# Altium PCB STM32 Project 1C.PcbDoc
Units mm, origin at the board's own origin, x right, y up, seen from the top; angles counter-clockwise.
Board outline 45 x 45 mm, 2 copper layers (Top Layer, Bottom Layer), stack 0.695 mm thick; 47 components, 42 nets, 216 pads, 48 vias.
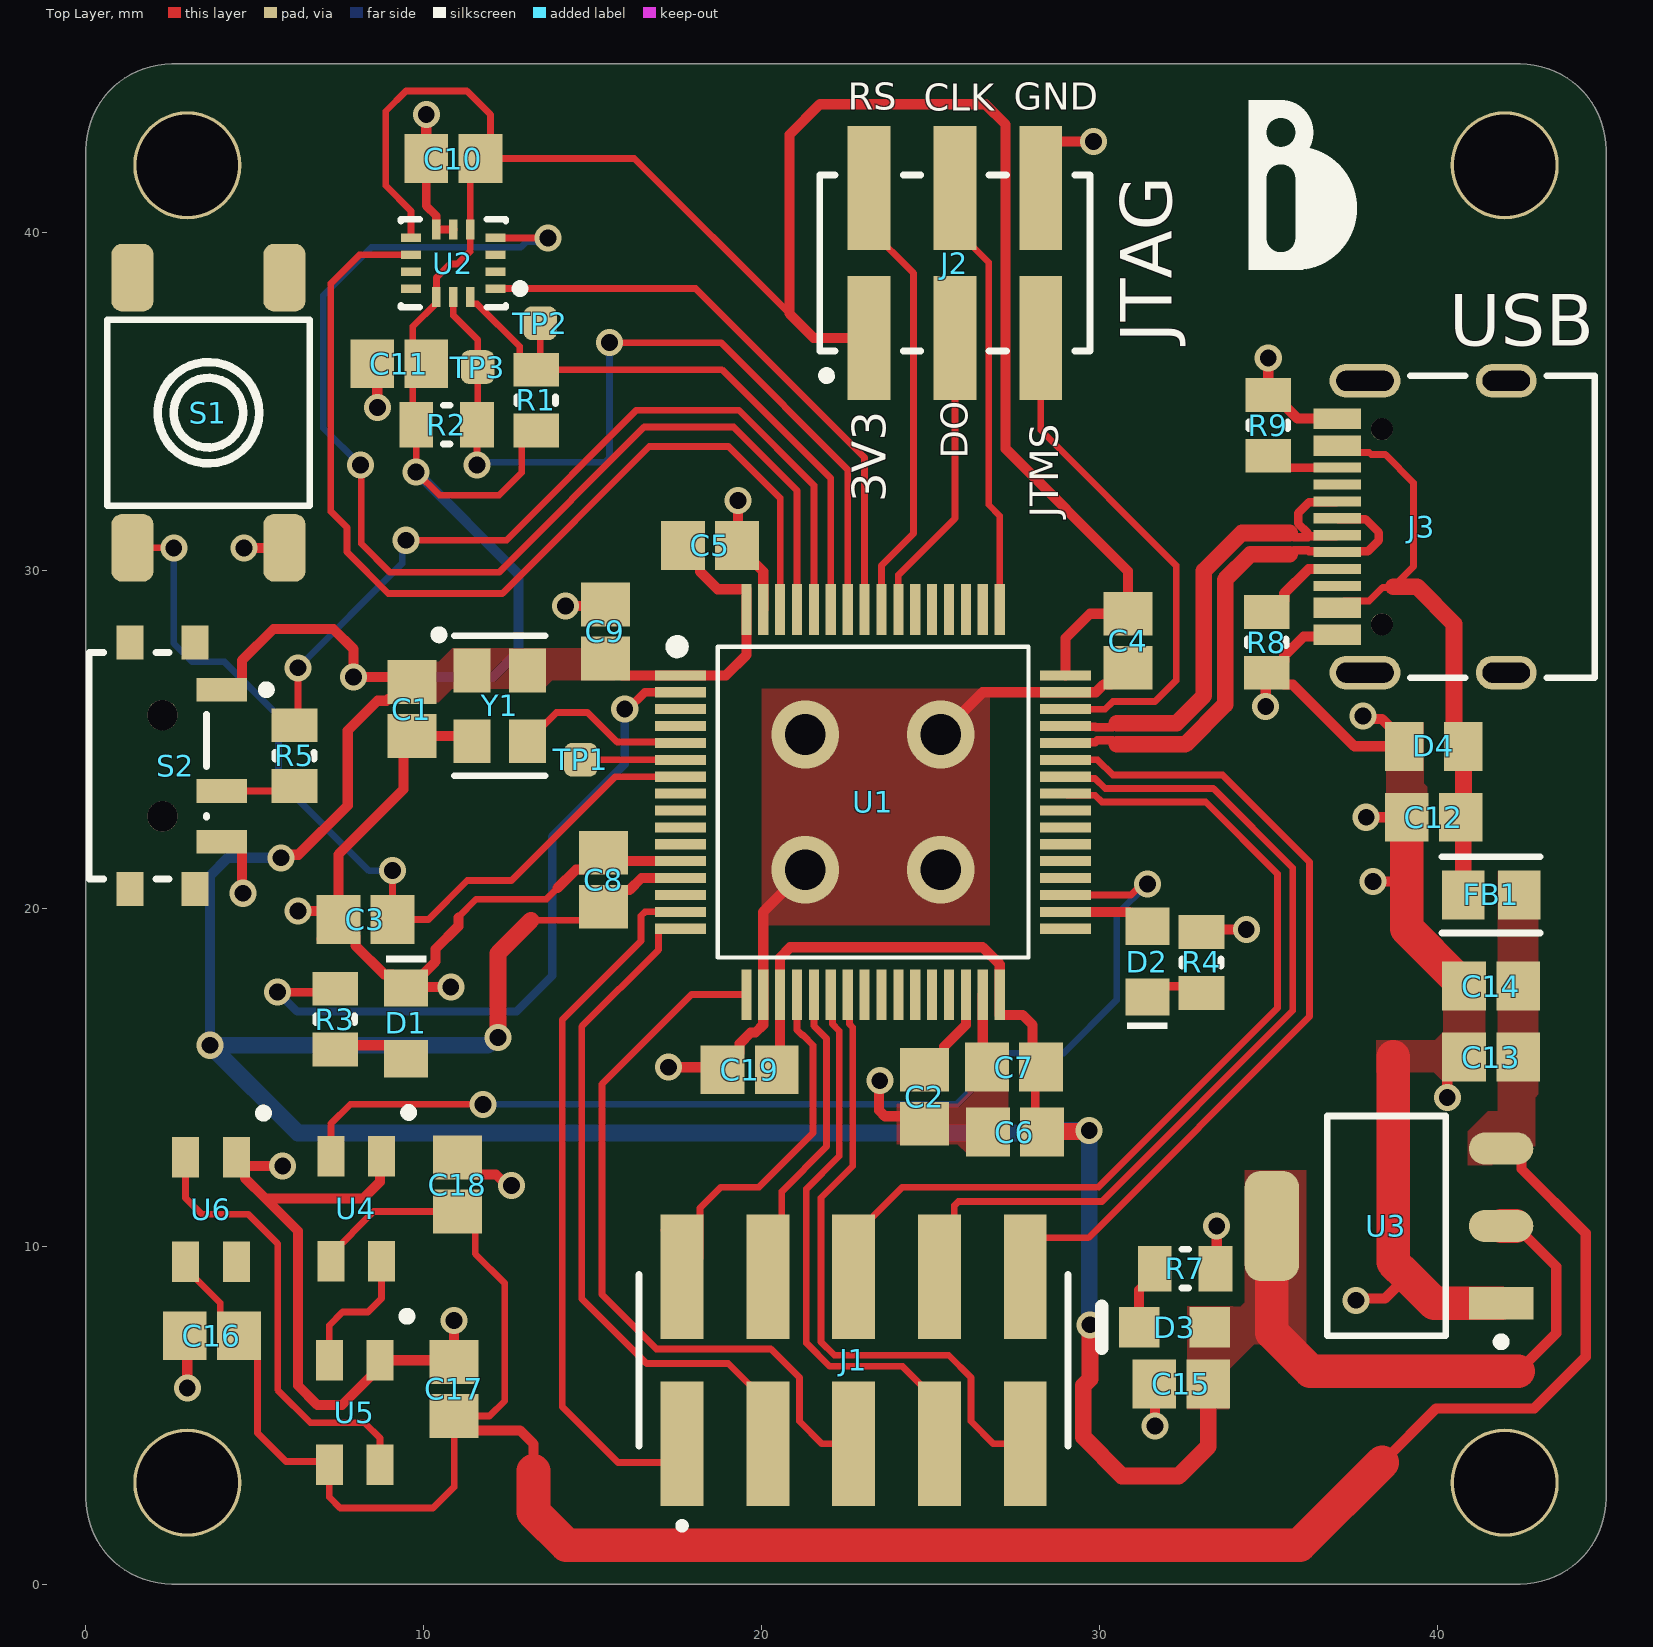
[diagram p0: Top Layer view]
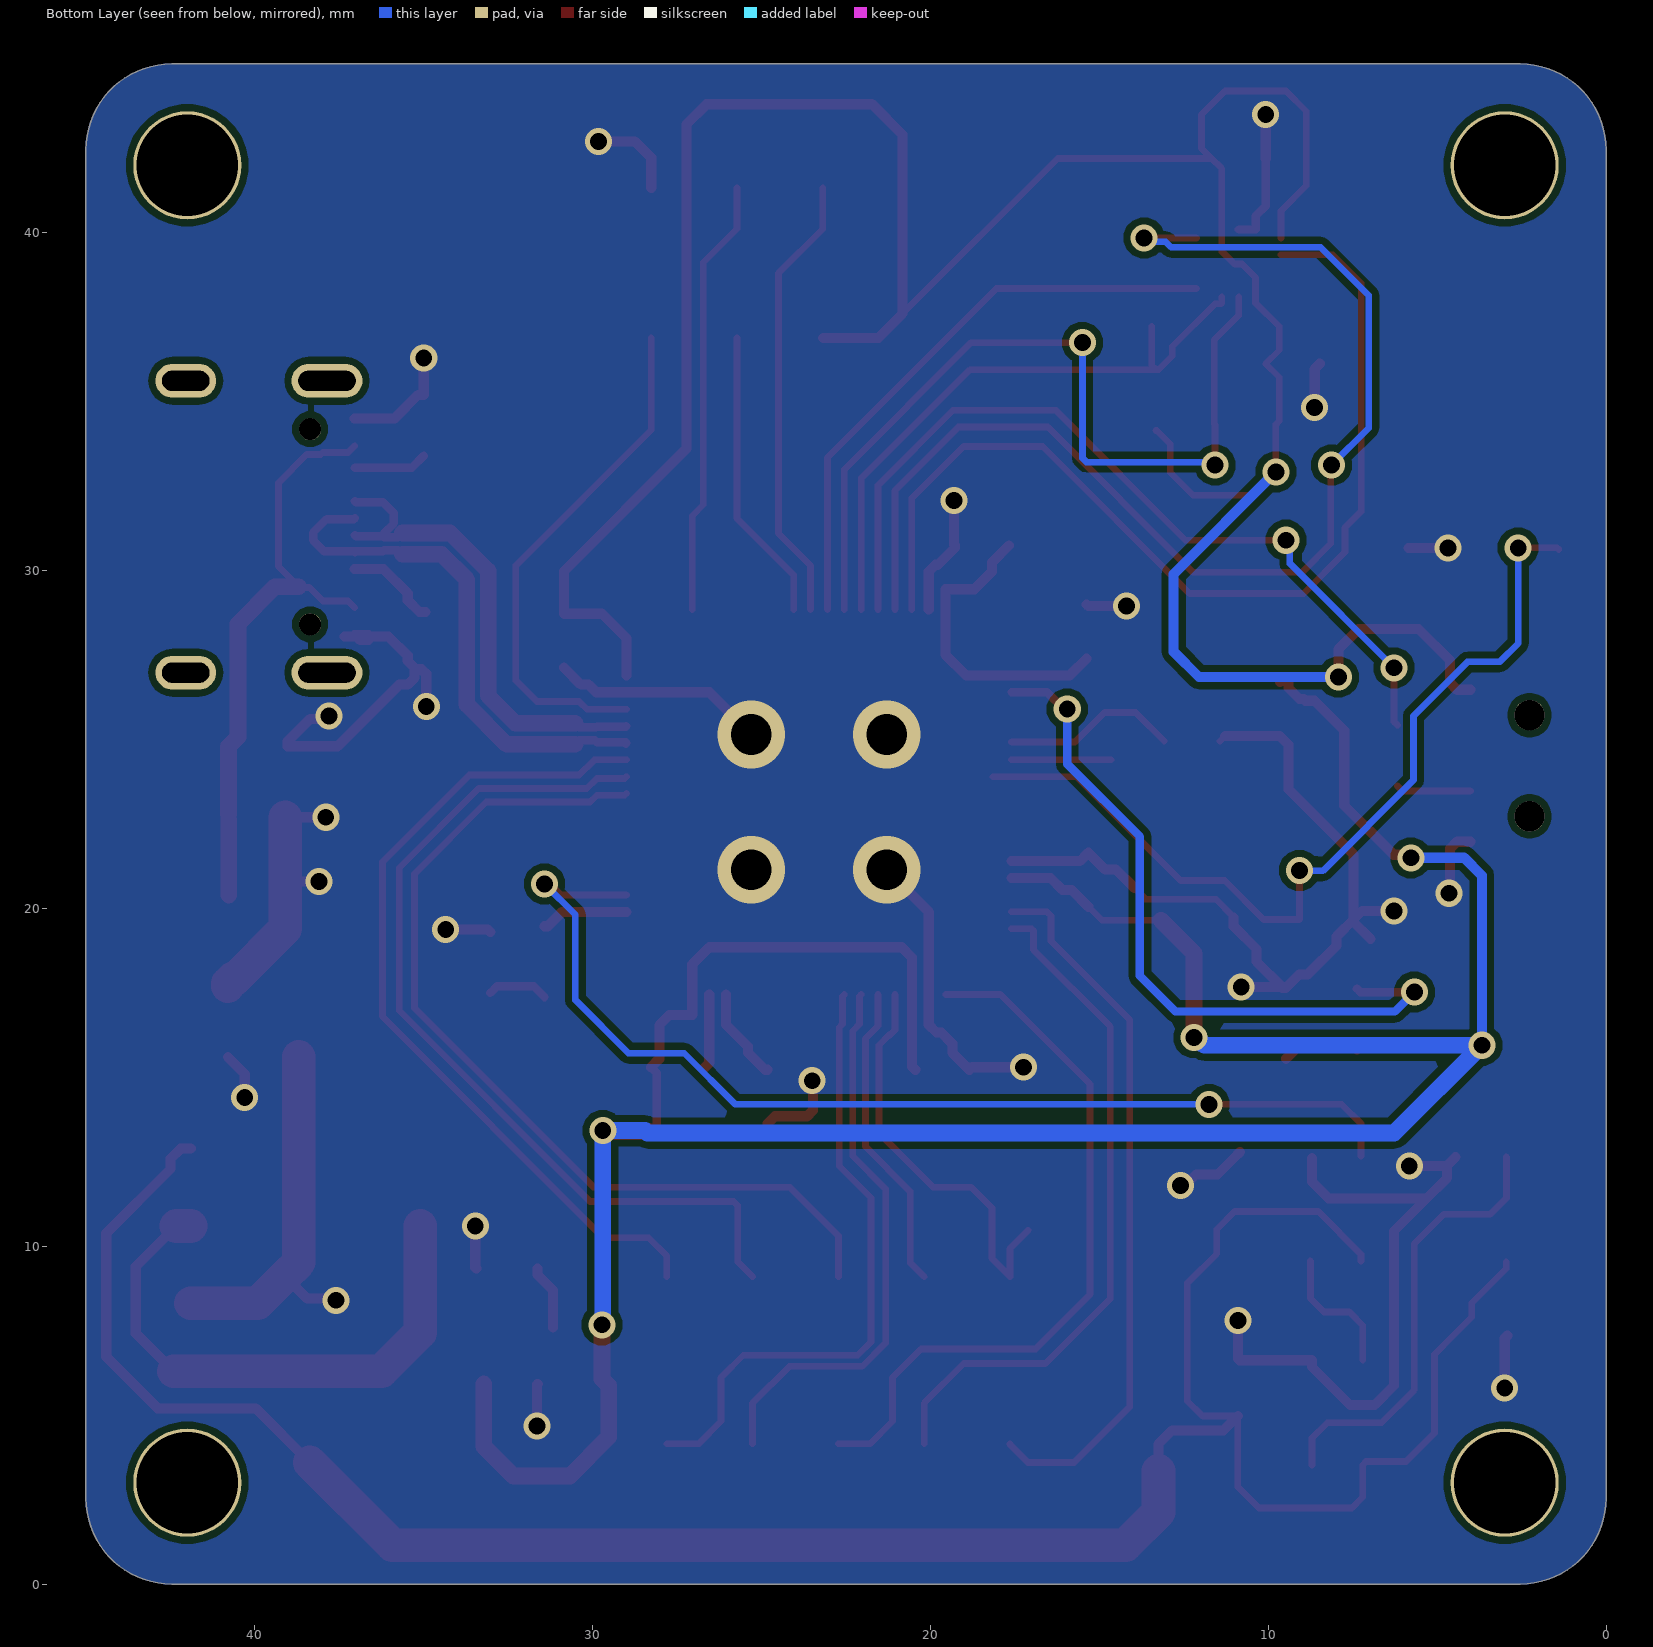
[diagram p1: Bottom Layer view, seen from below]
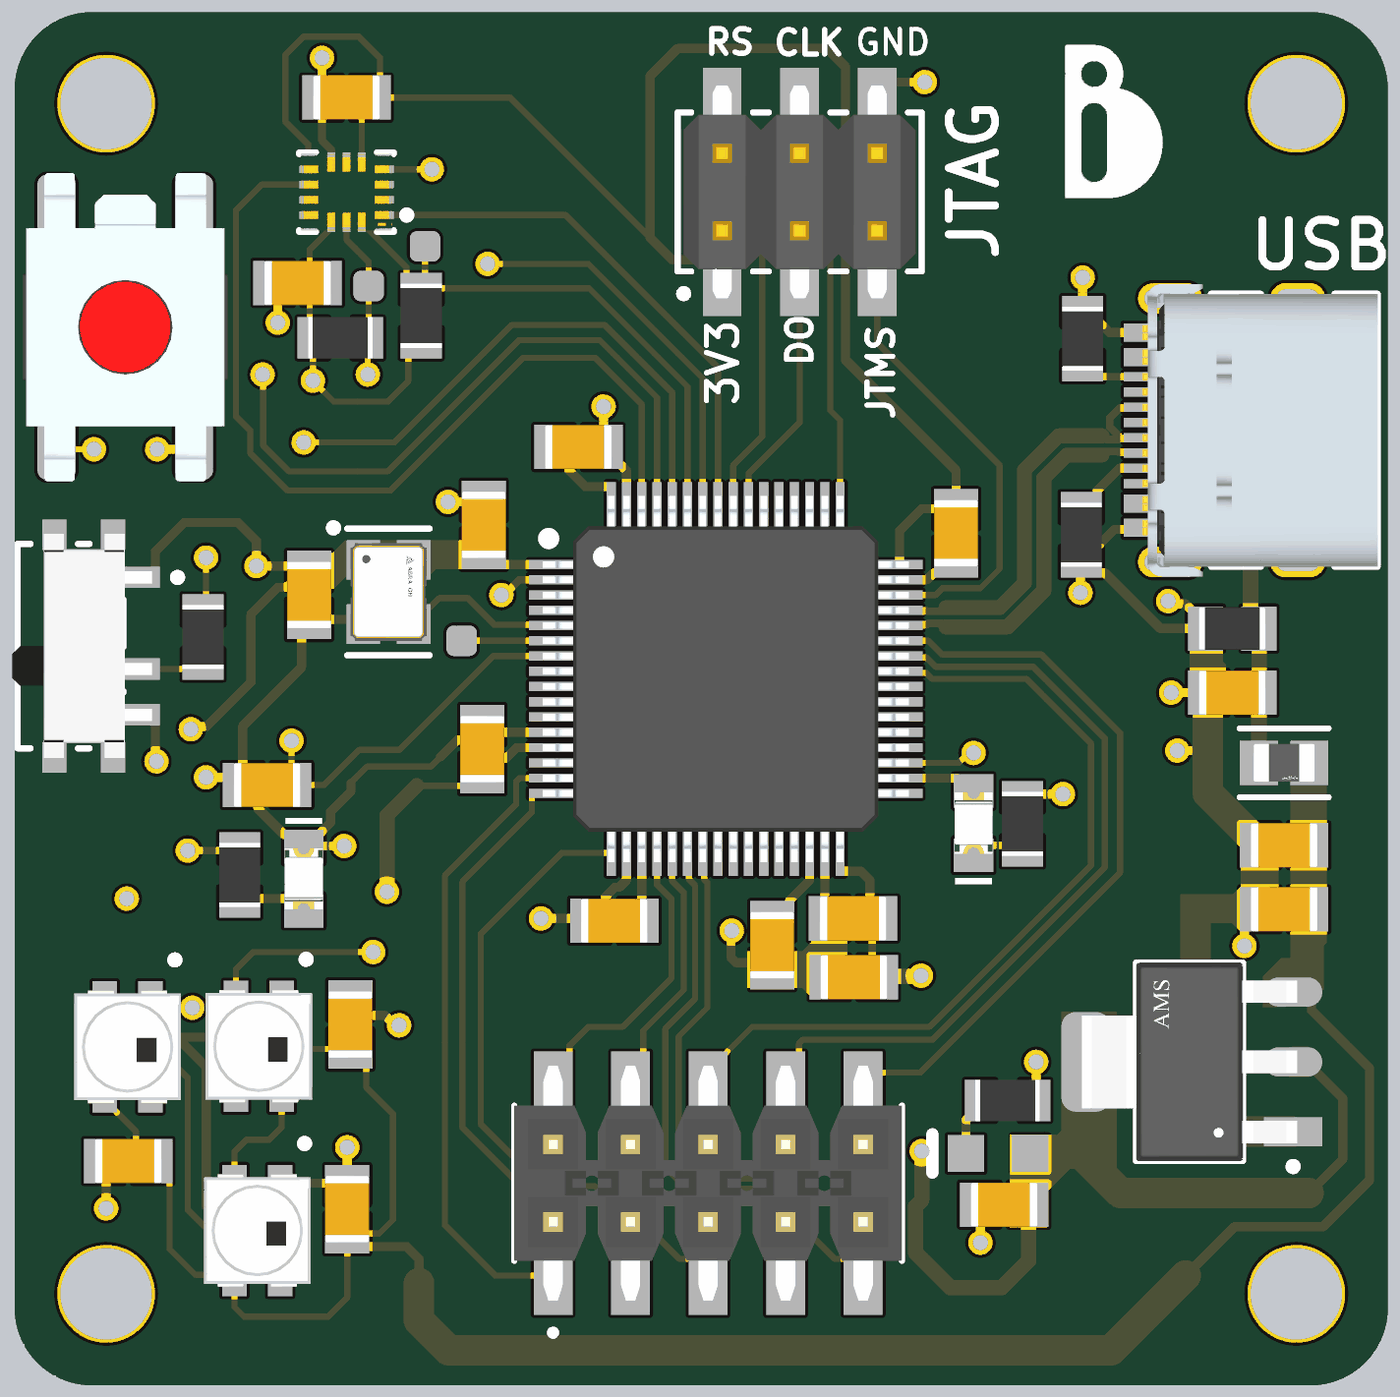
[diagram p2: 3D render of the assembled board from above, using the file's embedded part models]

## Layer stack, top to bottom
Top Solder: solder mask 0.0102, Solder Resist, Dk 4.6
Top Layer: signal copper 0.0152
Dielectric 1: dielectric 0.665, FR-4, Dk 4.6
Bottom Layer: signal copper 0.0152
Bottom Solder: solder mask 0.0102, Solder Resist, Dk 4.6

## Board outline
0,2.54 0,42.46 cw(c2.54,42.46) 2.54,45 42.46,45 cw(c42.46,42.46) 45,42.46 45,2.54 cw(c42.46,2.54) 42.46,0 2.54,0 cw(c2.54,2.54)

## Design rules (kind name [scope] priority, off if disabled: settings)
Clearance [All] p1: gap=0.2 ignorepadtopadclearanceinfootprint=TRUE except(0.127: Arc-Arc Arc-Track Track-Track SMDPad-SMDPad; 0.33: Arc-Hole Track-Hole)
DiffPairsRouting [All] p1: maxlimit=0.14 minlimit=0.14 mostfreqgap=0.14 toplayer_minwidth=0.25 toplayer_maxwidth=0.49 toplayer_prefwidth=0.49 bottomlayer_minwidth=0.25 bottomlayer_maxwidth=0.49 bottomlayer_prefwidth=0.49 impedanceprofiledriven=TRUE impedanceprofileid={F4CBB084-590F-4738-A755-8F10FD4772D8} impedanceprofilevalue=90.000000 maxuncoupledlength=12.7
HoleSize [All] p1: absolutevalues=TRUE maxlimit=5 minlimit=0.025 maxpercent=80.000 minpercent=20.000
MinimumSolderMaskSliver [All] p1: minsoldermaskwidth=0.04
PlaneConnect [All] p1: planeconnectstyle=Direct reliefexpansion=0.508 reliefentries=4 reliefconductorwidth=0.254 reliefairgap=0.254
PolygonConnect [All] p1: connectstyle=Direct reliefconductorwidth=0.254 reliefentries=4 polygonreliefangle="90 Angle" airgapwidth=0.254
RoutingVias [All] p1: holewidth=0.711 width=1 viastyle="Through Hole" minholewidth=0.5 minwidth=0.8 maxholewidth=1 maxwidth=1.5
SilkToSolderMaskClearance [IsPad] p1: minsilkscreentomaskgap=0.1 clearancetoexposedcopper=TRUE
SolderMaskExpansion [All] p1: expansion=0.102 istentingtop=FALSE
SupplyNets "Schematic Supply Nets_3" [InNet('+3V3')] p1: voltage=0.000
SupplyNets "Schematic Supply Nets_2" [InNet('GND')] p2: voltage=0.000
SupplyNets "Schematic Supply Nets_1" [InNet('VBUS')] p3: voltage=0.000
SupplyNets "Schematic Supply Nets" [InNet('+5V')] p4: voltage=0.000
UnRoutedNet [All] p1: checkbadconnections=TRUE
Width [All] p1: maxlimit=1 minlimit=0.2 preferedwidth=0.3 minimp=50.000000 maximp=50.000000 favimp=50.000000
24 further rules are at their usual default settings.

## Classes and differential pairs
differential pair USB_D: +USB_D_P -USB_D_N

## Components (designator, comment, footprint, x,y, rotation, side; value= is the part's Value field where it differs from the comment)
C1 "100n" CAP_0805 9.65,25.9 r90 top
C2 "2u2" CAP_0805 24.825,14.425 r90 top
C3 "100n" CAP_0805 8.275,19.675 r0 top
C4 "100n" CAP_0805 30.85,27.925 r90 top
C5 "100n" CAP_0805 18.475,30.75 r180 top
C6 "4.7u" CAP_0805 27.5,13.375 r0 top
C7 "100n" CAP_0805 27.475,15.3 r0 top
C8 "100n" CAP_0805 15.325,20.85 r270 top
C9 "100n" CAP_0805 15.375,28.2 r270 top
C10 "100n" CAP_0805 10.875,42.2 r0 top
C11 "100n" CAP_0805 9.275,36.125 r0 top
C12 "2u2" CAP_0805 39.9,22.7 r0 top
C13 "2u2" CAP_0805 41.6,15.6 r0 top
C14 "22u" CAP_0805 41.6,17.7 r0 top
C15 "22u" CAP_0805 32.425,5.925 r0 top
C16 "100n" CAP_0805 3.725,7.35 r0 top
C17 "100n" CAP_0805 10.9,5.775 r270 top
C18 "100n" CAP_0805 11,11.825 r270 top
C19 "100n" CAP_0805 19.65,15.225 r0 top
D1 "LED_RED_0805" LED_RED_0805 9.475,16.6 r270 top
D2 "LED_RED_0805" LED_RED_0805 31.425,18.425 r90 top
D3 "LED_GREEN" LED_GREEN_0805 32.225,7.6 r180 top
D4 "TVS_0805" TVS_0805 39.9,24.8 r0 top value=0.05pF
FB1 "120R" FERRITE_BEAD_0805 41.6,20.4 r0 top
J1 "PIN EXTENDER" 10P_2x5_HEADER 22.725,6.625 r180 top
J2 "JTAG" 6P_2x3_HEADER 25.725,39.107 r0 top
J3 "USB-C" "USB-C SMD 16 Pin" 40.9,31.3 r90 top
R1 "2K2" RES_0805 13.325,35.05 r90 top
R2 "2K2" RES_0805 10.675,34.325 r0 top
R3 "1K" RES_0805 7.375,16.725 r270 top
R4 "1K" RES_0805 33.025,18.4 r270 top
R5 "10K" RES_0805 6.175,24.525 r90 top
R7 "1K" RES_0805 32.538,9.338 r180 top
R8 "5K1" RES_0805 34.95,27.875 r270 top
R9 "5K1" RES_0805 35,34.3 r90 top
S1 "PUSH_BUTTON_I4SW" PUSH_BUTTON_I4SW 1.377,30.675 r90 top
S2 "BOOT_SW" SLIDE_SWITCH_SPDT 1.515,24.225 r270 top
TP1 "OSC_TP" TEST_POINT_SMD 14.65,24.4 r0 top
TP2 "SDA_TP" TEST_POINT_SMD 13.45,37.325 r90 top
TP3 "SCL_TP" TEST_POINT_SMD 11.6,36.025 r90 top
U1 "STM32F411RET6" STM32F411RET6 23.3,23.15 r0 top
U2 "BMI160" BMI160 10.875,39.1 r180 top
U3 "AMS1117-3.3" AMS1117-3.3 38.5,10.6 r180 top
U4 "SK6812-3535" SK6812-3535 8.053,11.061 r270 top
U5 "SK6812-3535" SK6812-3535 8.003,5.026 r270 top
U6 "SK6812-3535" SK6812-3535 3.753,11.041 r270 top
Y1 "25MHz" XTAL_OSCILLATOR_25MHz 12.25,26 r270 top

## Footprints (in the part's own frame and the unit in brackets; to place one, negate y for a bottom-side part, rotate by r counter-clockwise, add the part's x,y. Pads: shape width x height; smd on the part's side, far side on the other; paste and mask are expansions set on the pad)
6P_2x3_HEADER [mm] "Male Header, Pitch 2.54 mm, 2 x 3 Position, Height 8.13 mm, -65 to 125 degC, RoHS, Tube"
  rect 1.27x3.68 smd paste+0 mask+0: 1(-2.54,-2.22) 2(-2.54,2.22) 3(0,-2.22) 4(0,2.22) 5(2.54,-2.22) 6(2.54,2.22)
  silkscreen extent -4,-3.46 4,2.61, body extent -4.1,-4.16 4.1,4.16, height 0.25
10P_2x5_HEADER [mm] "10 Position SMD Pin Header 2x5"
  rect 1.27x3.68 smd: 1(5.08,2.475) 2(5.08,-2.475) 3(2.54,2.475) 4(2.54,-2.475) 5(0,2.475) 6(0,-2.475) 7(-2.54,2.475) 8(-2.54,-2.475) 9(-5.08,2.475) 10(-5.08,-2.475)
  silkscreen extent -6.35,-2.54 6.35,5, body extent -6.35,-3.85 6.35,3.85, height 9.91
AMS1117-3.3 [mm] "LDO Voltage Regulators 1A, 3.3V"
  rect 1.905x0.952 smd paste+0 mask+0: 1(-3.395,2.29)
  rrect100% 1.905x0.952 smd paste+0 mask+0: 2(-3.395,0) 3(-3.395,-2.29)
  rrect59% 1.604x3.262 smd paste+0 mask+0: 4(3.395,0)
  silkscreen extent -3.52,-3.25 1.75,3.55, body extent -4.7,-3.75 4.7,3.75, height 0.25
BMI160 [mm] "IMU ACCEL/GYRO I2C/SPI 14LGA"
  rect 0.6x0.25 smd paste+0 mask+0: 1(-1.25,0.75) 2(-1.25,0.25) 3(-1.25,-0.25) 4(-1.25,-0.75) 8(1.25,-0.75) 9(1.25,-0.25) 10(1.25,0.25) 11(1.25,0.75)
  rect 0.25x0.6 smd paste+0 mask+0: 5(-0.5,-1) 6(0,-1) 7(0.5,-1) 12(0.5,1) 13(0,1) 14(-0.5,1)
  silkscreen extent -2.1,-1.3 1.55,1.3, body extent -2.05,-1.8 2.05,1.8, height 0.25
CAP_0805 [mm] "Chip Capacitor, 2-Leads, Body 2.00x1.25mm, IPC Medium Density"
  rect 1.3x1.45 smd: 1(-0.8,0) 2(0.8,0)
  body extent -1.1,-0.72 1.1,0.72, height 1
FERRITE_BEAD_0805 [mm] "FERRITE BEAD 120 OHM 0805 1LN"
  rect 1.255x1.456 smd paste+0 mask+0: 1(-0.826,0) 2(0.826,0)
  silkscreen extent -1.45,-1.13 1.45,1.13, body extent -1.7,-0.98 1.7,0.98, height 0.25
LED_GREEN_0805 [mm] "SMD, 2-Leads, Body 2x1.25mm, Height 0.8mm"
  rect 1.2x1.2 smd: 1(-1.05,0) 2(1.05,0)
  silkscreen extent 2.15,-0.63 2.15,0.63, body extent -1,-0.63 1,0.63, height 0.8
LED_RED_0805 [mm] "SMD Mono-color Chip LED, body 2.0x1.25mm"
  rect 1.1x1.3 smd: 1(-1.05,0) 2(1.05,0)
  silkscreen extent -2,-0.6 -1.8,0.6, body extent -1,-0.63 1,0.62, height 0.7
PUSH_BUTTON_I4SW [mm]
  rrect50% 2x1.25 smd: 1(0,0) 2(8,0) 3(0,-4.5) 4(8,-4.5)
  silkscreen extent 1.25,-5.25 6.75,0.75, body extent -1.05,-5.6 9.05,1.1, height 3.75
RES_0805 [mm] "Chip Resistor, 2-Leads, Body 2.00x1.25mm, IPC Medium Density"
  rect 1x1.35 smd: 1(-0.9,0) 2(0.9,0)
  silkscreen extent -0.1,-0.58 0.1,0.58, body extent -1.05,-0.67 1.05,0.67, height 0.6
SK6812-3535 [mm] "SMD, 4-Leads, Body 5x5mm"
  rect 1.2x0.8 smd: 1(-1.6,0.7) 2(-1.6,-0.8) 3(1.5,-0.8) 4(1.5,0.7)
  silkscreen extent -3.02,1.38 -2.78,1.63, body extent -1.9,-1.8 1.8,1.7, height 1.13
SLIDE_SWITCH_SPDT [mm] "SWITCH SLIDE SPDT 300MA 6V"
  rect 0.7x1.5 smd paste+0 mask+0: 1(-2.25,2.5) 2(0.75,2.5) 3(2.25,2.5)
  rect 1x0.8 smd paste+0 mask+0: 4(-3.65,1.715) 5(3.65,1.715) 6(-3.65,-0.215) 7(3.65,-0.215)
  round 0.9 hole 0.9 unplated paste-2539.97 mask+0: ""(-1.5,0.75) ""(1.5,0.75)
  silkscreen extent -3.35,-1.42 3.35,3.95, body extent -4.25,-1.39 4.25,4.11, height 0.25
STM32F411RET6 [mm] "ARM® Cortex®-M4 STM32F4 Microcontroller IC 32-Bit Single-Core 100MHz 512KB (512K x 8) FLASH 64-LQFP (10x10)"
  rect 1.5x0.3 smd: 1(-5.7,3.75) 2(-5.7,3.25) 3(-5.7,2.75) 4(-5.7,2.25) 5(-5.7,1.75) 6(-5.7,1.25) 7(-5.7,0.75) 8(-5.7,0.25) 9(-5.7,-0.25) 10(-5.7,-0.75) 11(-5.7,-1.25) 12(-5.7,-1.75) 13(-5.7,-2.25) 14(-5.7,-2.75) 15(-5.7,-3.25) 16(-5.7,-3.75) 33(5.7,-3.75) 34(5.7,-3.25) 35(5.7,-2.75) 36(5.7,-2.25) 37(5.7,-1.75) 38(5.7,-1.25) 39(5.7,-0.75) 40(5.7,-0.25) 41(5.7,0.25) 42(5.7,0.75) 43(5.7,1.25) 44(5.7,1.75) 45(5.7,2.25) 46(5.7,2.75) 47(5.7,3.25) 48(5.7,3.75)
  rect 0.3x1.5 smd: 17(-3.75,-5.7) 18(-3.25,-5.7) 19(-2.75,-5.7) 20(-2.25,-5.7) 21(-1.75,-5.7) 22(-1.25,-5.7) 23(-0.75,-5.7) 24(-0.25,-5.7) 25(0.25,-5.7) 26(0.75,-5.7) 27(1.25,-5.7) 28(1.75,-5.7) 29(2.25,-5.7) 30(2.75,-5.7) 31(3.25,-5.7) 32(3.75,-5.7) 49(3.75,5.7) 50(3.25,5.7) 51(2.75,5.7) 52(2.25,5.7) 53(1.75,5.7) 54(1.25,5.7) 55(0.75,5.7) 56(0.25,5.7) 57(-0.25,5.7) 58(-0.75,5.7) 59(-1.25,5.7) 60(-1.75,5.7) 61(-2.25,5.7) 62(-2.75,5.7) 63(-3.25,5.7) 64(-3.75,5.7)
  silkscreen extent -6.08,-4.6 4.6,4.88, body extent -6,-6 6,6, height 1.6
TEST_POINT_SMD [mm] "Test Point SMD Generic - for in circuit test"
  rrect50% 1x1 smd: 1(0,0)
TVS_0805 [mm] "Chip Diode, 2-Leads, Body 2.00x1.25mm, IPC Medium Density"
  rect 1.15x1.45 smd: 1(-0.875,0) 2(0.875,0)
  body extent -1.1,-0.7 1.1,0.7, height 1.2
"USB-C SMD 16 Pin" [mm] "USB TYPE C VERTICAL PLUG"
  rect 0.6x1.4 smd: A1/B12(-3.2,3.859) A4/B9(-2.4,3.859) A9/B4(2.4,3.859) A12/B1(3.2,3.859)
  rect 0.3x1.4 smd: A5(-1.25,3.859) A6(-0.25,3.859) A7(0.25,3.859) A8(1.25,3.859) B5(1.75,3.859) B6(0.75,3.859) B7(-0.75,3.859) B8(-1.75,3.859)
  round 0.65 hole 0.65 unplated: MH1(-2.89,2.535) MH2(2.89,2.535)
  oval 1x1.8 hole 0.6 slot 1.4 at 90 deg: Shell(-4.32,-1.145) Shell(4.32,-1.145)
  oval 1x2.1 hole 0.6 slot 1.7 at 90 deg: Shell(-4.32,3.035) Shell(4.32,3.035)
  silkscreen extent -4.47,-3.76 4.47,1.7, body extent -4.79,-3.76 4.79,3.95, height 3.33
XTAL_OSCILLATOR_25MHz [mm] "XTAL Oscillator 25MHz ±50ppm CMOS 3.3V 4-SMD 3.2mm x 2.5mm"
  rect 1.3x1.1 smd paste+0 mask+0: 1(-1.05,-0.825) 2(1.05,-0.825) 3(1.05,0.825) 4(-1.05,0.825)
  silkscreen extent -2.22,-1.92 2.07,1.35, body extent -1.8,-1.48 1.8,1.48, height 0.25

## Part data
C1 C2 C3 C4 C5 C6 C7 C8 C9 C10 C11 C12 C13 C14 C15 C16 C17 C18 C19: library part CAP_0805, "Capacitor SMD 0805 Generic"
D1 D2: "Chip LED, Green, 2.2 V, -40 to 85 degC, 2-Pin SMD, Pb-Free, Tape and Reel", Case Code (Imperial)=0805, Case Code (Metric)=2012, Color=Red, Forward Current=100mA, Forward Voltage=2V, Max Operating Temperature=85°C, Max Reverse Voltage (DC)=5V, Min Operating Temperature=-40°C, Test Current=20mA, Case/Package=0805, Dominant Wavelength=625nm, Height=700µm, Length=2mm, Lens Style="Clear, Rectangular", Luminous Intensity=150mcd, Mount="Surface Mount", NexarPartId=29717781, Packaging="Tape and Reel", Peak Wavelength=630nm, REACH SVHC=Unknown, RoHS=Compliant, Viewing Angle=140°, Wavelength=625nm, Width=1.25mm
D3: library part LED_GREEN_0805, "Chip LED, Green, 2.2 V, -40 to 85 degC, 2-Pin SMD, Pb-Free, Tape and Reel", Forward Current If=20mA, Forward Voltage=2.2V, Forward Voltage VF Max=2.6V, LED Colour=Green, Manufacturer=Avago, Operating Temperature Max=85degC, Operating Temperature Min=-30degC, Operating Temperature Range=-30degCto+85degC, Opto Case Style=SMD, Package Description="2-Pin Surface Mount Device, Body 2 x 1.25 mm, Height 0.8 mm", Package Reference=HSMX-C170, Storage Temperature Min=-40degC, Bulb Size=1.25mmx1.4mm, Datasheet URL=https://datasheet.ciiva.com/29280/180495-da-01-en-chip-led-hsmg-c170-gelb-gruen-29280971.pdf, Datasheet Version=Oct-08, Dominant Wavelength=572nm, Dominant Wavelength Typ=572nm, External Depth=0.8mm, External Length / Height=2mm, External Width=1.25mm, Forward Current If Max=20mA, LED Mounting=SMD, LED Type=Standard, Lens Shape=Rectangular, Light Area Height=1mm, Luminous Intensity=15mcd, Luminous Intensity Min=4mcd, Luminous Intensity Typ=15mcd, Manufacturer URL=http://www.avagotech.com/, Mounting Type=SMD, MSL=MSL2A-4weeks, No. of Pins=2, Opto Mounting Orientation=Top, Packaging=CutTape, Peak Forward Current=20mA, Peak Wavelength=570nm, PIV Max=5V, Storage Temperature Max=85degC, SVHC=NoSVHC(16-Jun-2014), Viewing Angle=170deg, Voltage Vf Typ=2.2V, Wavelength Typ=570nm
D4: "ESD Suppressor SMD 0805", Capacitance=0.05pF, Clamping Voltage=100V, Manufacturer=Panasonic, Manufacturer Part Number=EZA-EG2A50AX, Package=EZAEG2A, Reverse Standoff Voltage=30V, Temperature="-55°C to +125°C", Temperature Range High=+125°C, Temperature Range Low=-55°C, Automotive=No, Category=Diode, ComponentLink2Description=Datasheet, ComponentLink2URL=https://industrial.panasonic.com/cdbs/www-data/pdf/AWD0000/AWD0000C23.pdf, Device Class L1="Circuit Protection", Device Class L2="TVS Diodes", Device Class L3=unset, Digikey Description="VARISTOR 0402", Direction=Bidirectional, Height=0.43mm, Ipc Land Pattern Name=INDC10050X38, Lead Free=Yes, Mouser Description="ESD Suppressors 15V 0402 SUPPRESSOR ESD", Number Of Channels=1, Octopart=https://octopart.com/eza-eg2a50ax-panasonic-39557977, RoHS=TRUE
FB1: library part FERRITE_BEAD_0805, "FERRITE BEAD 120 OHM 0805 1LN", Case Code (Imperial)=0805, Case Code (Metric)=2012, Current Rating=800mA, DC Current=200mA, DC Resistance (DCR)=100mR, Frequency=100MHz, Max Current Rating=1A, Max Operating Temperature=125°C, Min Operating Temperature=-55°C, Package Quantity=1, Resistance=150mR, Tolerance=25%, Case/Package=0805, Core Material=Ferrite, DC Resistance-Max=100mR, Depth=1.25mm, Height=0.85mm, Impedance=120R, Lead Free="Lead Free", Length=2mm, Material=Steel, Max DC Current=200mA, Military Standard=Not, Number of Circuits=1, Number of Lines=1, Number of Pins=2, Packaging="Tape and Reel", Radiation Hardening=No, REACH SVHC="No SVHC", Series=BLM21A, Shielding=Unshielded, Termination=SMD/SMT, Test Frequency=100MHz, Width=1.25mm
J1: library part 10P_2x5_HEADER, "10 Position SMD Pin Header 2x5"
J2: library part 6P_2x3_HEADER, "Male Header, Pitch 2.54 mm, 2 x 3 Position, Height 8.13 mm, -65 to 125 degC, RoHS, Tube", Max Operating Temperature="150 degC", Max Supply Voltage="5.5 V", Min Operating Temperature="-40 degC", Min Supply Voltage="4.5 V", Nominal Supply Voltage="5 V", Package Quantity=3000, ComponentLink1Description="Manufacturer URL", ComponentLink1URL=http://www.te.com/, ComponentLink2Description=Datasheet, ComponentLink2URL=http://www.te.com/commerce/DocumentDelivery/DDEController?Action=showdoc&DocId=Customer+Drawing%7F146130%7FM%7Fpdf%7FEnglish%7FENG_CD_146130_M.pdf%7F5-146130-2, DatasheetVersion=Oct-15, Mount="Surface Mount", PackageDescription="Male Header, Pitch 2.54 mm, 2 x 3 Position, Height 8.13 mm", PackageReference=5-146130-2, Packaging="Tape and Reel", Pins=3, Radiation Hardening=No, RoHSCompliant=true
J3: library part "USB-C SMD 16 Pin", "Usb Conn, 2.0 Type C, R/A Rcpt, 16P, Smt Rohs Compliant: Yes", Current Rating=5A, Insulation Resistance=100MR, Manufacturer="Wurth Electronics", Manufacturer Part Number=629722000214, Max Operating Temperature=85°C, Min Operating Temperature=-40°C, Supplier Part Number=69AK2245, Voltage Rating=20V, ComponentLink1Description=https://datasheet.octopart.com/629722000214-Wurth-Elektronik-datasheet-168263062.pdf?src-supplier=Element14, ComponentLink1URL=https://datasheet.octopart.com/629722000214-Wurth-Elektronik-datasheet-168263062.pdf?src-supplier=Element14, Contact Material=Nickel,Gold, Gender=Receptacle, Height=3.51mm, Number of Contacts=12, Packaging="Tape and Reel", Pin Length=950um, Pins=16, Pricing="1=4.22, 10=3.98, 25=3.76, 50=3.47, 100=3.17, 250=2.8 (USD)", RoHS=No, Stock=1749, Supplier=Newark, USB Standard="USB 2.0"
R1 R2 R3 R4 R5 R7 R8 R9: library part RES_0805, "Resistor SMD 0805 Generic"
S1: "Korean Hroparts Elec K2-1157SP-I4SW-01 Standing paste 250gf 12V 100000 Times Without 50mA SMD Pushbutton Switches"
S2: library part SLIDE_SWITCH_SPDT, "SWITCH SLIDE SPDT 300MA 6V", Max Current=300mA, Max Voltage=6V
TP1 TP2 TP3: library part TEST_POINT_SMD, "Test Point SMD Generic - for in circuit test"
U1: "ARM® Cortex®-M4 STM32F4 Microcontroller IC 32-Bit Single-Core 100MHz 512KB (512K x 8) FLASH 64-LQFP (10x10)"
U2: "IMU ACCEL/GYRO I2C/SPI 14LGA", Case/Package=LGA, Max Operating Temperature=85°C, Min Operating Temperature=-40°C, Lead Free="Lead Free", Mount="Surface Mount", Output Type=SPI, Packaging="Cut Tape", Sensor Type=Accelerometer
U3: "LDO Voltage Regulators 1A, 3.3V", Dropout Voltage=1.1V, Manufacturer="Advanced Monolithic Systems", Max Junction Temp=+125°C, Max Power Dissipation=1.2W, Max Supply Voltage=15V, Nominal Supply Current=5mA, Output Current=1A, Output Voltage=3.3V, Package=AMS1117, Temperature="-40°C to +125°C", Temperature Range Low=-40°C, Automotive=No, Category=IC, ComponentLink2Description=Datasheet, ComponentLink2URL=http://www.advanced-monolithic.com/pdf/ds1117.pdf, Device Class L1="Integrated Circuits (ICs)", Device Class L2="Power Management ICs", Device Class L3="Voltage Regulators - Linear", Height=1.8mm, Ipc Land Pattern Name=SOT229P700X180-4, Lead Free=Yes, Manufacturer Part Number=AMS1117-3.3, Number Of Outputs=1, Octopart=https://octopart.com/ams1117-3.3-advanced+monolithic+systems-25899300, Output Type=Fixed, RoHS=TRUE, Standoff Height=0.64mm, Temperature Range High=+125°C
U4 U5 U6: "NeoPixel 5050 RGB LED with Integrated Driver Chip - 10 Pack", Color=Blue,Green,Red, Manufacturer="Adafruit Industries", Manufacturer Part Number=1655, Max Operating Temperature=85°C, Min Operating Temperature=-40°C, Supplier Part Number=1528-1104-ND, Category=LEDs, ComponentLink1Description=http://www.mouser.com/ds/2/737/SK6812_LED_datasheet_-953546.pdf?src-supplier=Mouser, ComponentLink1URL=http://www.mouser.com/ds/2/737/SK6812_LED_datasheet_-953546.pdf?src-supplier=Mouser, ComponentLink2Description=https://cdn-shop.adafruit.com/product-files/1138/SK6812+LED+datasheet+.pdf?src-supplier=Digikey, ComponentLink2URL=https://cdn-shop.adafruit.com/product-files/1138/SK6812+LED+datasheet+.pdf?src-supplier=Digikey, Height=1.6mm, Interface=Serial, Length=5mm, Mounting Technology="Surface Mount", Number of LEDs=10, Pricing="1=4.5 (USD)", RoHS=Yes, Series=Neopixel, Stock=1730, Supplier=Digikey, Width=5mm
Y1: library part XTAL_OSCILLATOR_25MHz, "XTAL Oscillator 25MHz ±50ppm CMOS 3.3V 4-SMD 3.2mm x 2.5mm", Case/Package=SMD/SMT, Frequency Stability=50ppm, Load Capacitance=15pF, Max Operating Temperature=85°C, Max Supply Current=13mA, Max Supply Voltage=3.465V, Min Operating Temperature=-40°C, Min Supply Voltage=3.135V, Operating Frequency="25 MHz", Operating Supply Voltage=3.3V, Package Quantity=1000, Depth=2.5mm, Frequency=25MHz, Height=0.047inch, Lead Free="Lead Free", Length=3.2mm, Mount="Surface Mount", Number of Pins=4, Packaging="Tape and Reel", Radiation Hardening=No, Series=ASE, Termination=SMD/SMT, Width=2.5mm

## Free pads (board coordinates)
  round 3.2 hole 3: MH(3,3) MH(3,42) MH(42,3) MH(42,42)

## Via types
v1: diameter 0.8, hole 0.5, Top Layer to Bottom Layer, 44 vias
v2: diameter 2, hole 1.2, Top Layer to Bottom Layer, 4 vias

## Nets (pads, with @x,y where several pads share a name; then routed paths per layer and width w, separated by ;. In a path a pad name is that pad's centre, name@x,y a point inside that pad or via, vN(x,y) a via of type N, cw(c..) or ccw(c..) an arc to the next point about the centre after c; other vN are vias at no path point)
+3V3: C1.2 C4.2 C5.2 C6.2 C7.2 C8.2 C9.2 C10.2 C11.2 C15.2 C19.2 D3.1 J2.1 R1.1 R2.1 S2.1 U1.1 U1.13 U1.19 U1.32 U1.48 U1.64 U2.5 U2.8 U2.12 U3.2 U3.4 Y1.1 Y1.4 | length 207.9
  Top Layer w0.2: U2.8 9.625,40.65 8.875,41.4 8.875,43.6 9.475,44.2 11.275,44.2 11.975,43.5 11.975,42.5 C10.2 ; 13.175,19.65 14.925,19.65 C8.2 ; R1.1 13.3,34.15 12.9,33.75 12.9,32.9 12.235,32.235 10.465,32.235 v1(9.775,32.925) R2.1 9.675,34.425 9.675,35.725 C11.2 9.675,36.525 9.675,37.225 10.375,37.925 U2.12 10.375,38.675 10.775,39.075 11,39.075 11.375,39.45 U2.5 11.375,41.9 C10.2 ; 20.825,37.607 16.232,42.2 C10.2
  Top Layer w0.25: C7.2 28.102,15.127 28.102,13.573 C6.2
  Top Layer w0.3: S2.1 4.415,26.475 4.615,26.675 4.615,27.34 5.55,28.275 7.325,28.275 7.925,27.675 v1(7.925,26.85) 9.5,26.85 C1.2 ; v1(5.775,21.5) 5.864,21.589 6.289,21.589 7.75,23.05 7.75,25.27 8.63,26.15 8.9,26.15 8.95,26.2 9.075,26.2 9.4,26.525 C1.2@9.4,26.7 ; C8.2 15.825,20.55 16.095,20.55 16.445,20.9 U1.13 ; C9.2 15.875,26.9 18.95,26.9 19.55,27.5 U1.64 19.55,29.45 18.705,29.45 18.175,29.98 18.175,30.25 C5.2 ; C19.2 20.55,15.325 U1.19 20.55,18.55 20.85,18.85 26.545,18.85 27.05,18.345 U1.32 27.05,16.85 27.725,16.85 28.025,16.55 28.025,15.55 C7.2 ; J2.1 21.545,36.887 20.825,37.607 20.825,42.908 21.725,43.807 26.625,43.807 27.225,43.207 27.225,33.607 30.85,29.983 C4.2 29.725,28.725 29,28 U1.48 ; U3.2@42.324,10.6 43.525,9.399 43.525,7.425 42.4,6.3
  Top Layer w0.5: v1(12.2,16.175) 12.2,18.675 13.175,19.65 ; C6.2 28.325,13.4 29.675,13.4 v1(29.7,13.425) ; v1(29.725,7.675) 29.725,6.072 29.525,5.872 29.525,4.35 30.675,3.2 32.35,3.2 33.225,4.075 C15.2
  Top Layer w1: U3.4 35.105,7.445 36.25,6.3 42.4,6.3 ; U3.2 U3.2@42.324,10.6
  Bottom Layer w0.3: v1(3.675,15.95) 3.675,20.975 4.2,21.5 v1(5.775,21.5) ; v1(7.925,26.85) 12.05,26.85 12.8,27.6 12.8,29.9 v1(9.775,32.925)
  Bottom Layer w0.5: v1(12.2,16.175) 12.119,16.175 11.894,15.95 v1(3.675,15.95) 6.275,13.35 28.375,13.35 28.45,13.425 v1(29.7,13.425) 29.7,7.7 v1(29.725,7.675)
+5V: C13.2 C14.2 C16.2 C17.2 C18.2 FB1.2 U3.3 U4.3 U5.3 U6.3 | length 73.9
  Top Layer w0.2: U6.3 2.953,9.341 3.975,8.319 3.975,7.9 C16.2 5.075,6.8 5.075,4.475 5.925,3.625 7.104,3.625 U5.3 7.203,2.572 7.525,2.25 10.275,2.25 10.9,2.875 C17.2 11.95,4.975 12.4,5.425 12.4,8.9 11.525,9.775 11.525,10.5 C18.2 8.517,11.025 7.253,9.761 U4.3
  Top Layer w0.3: C17.2 11.325,4.55 12.85,4.55 13.25,4.15 13.25,3.35 ; 38.375,3.6 39.975,5.2 42.875,5.2 44.4,6.725 44.4,10.385 42.496,12.289 42.496,12.589 42.195,12.89 U3.3
  Top Layer w1: 13.25,3.35 13.25,2.125 14.225,1.15 35.925,1.15 38.375,3.6
ADDR_LED: U1.35 U4.2 | length 32.1
  Top Layer w0.2: U4.2 7.253,13.628 7.825,14.2 v1(11.75,14.2) ; U1.35 30.938,20.4 31.263,20.725 v1(31.425,20.725)
  Bottom Layer w0.2: v1(11.75,14.2) 25.775,14.2 27.287,15.712 28.937,15.712 30.512,17.288 30.512,19.813 v1(31.425,20.725)
GND: C1.1 C2.1 C3.1 C4.1 C5.1 C6.1 C7.1 C8.1 C9.1 C10.1 C11.1 C12.1 C13.1 C14.1 C15.1 C16.1 C17.1 C18.1 C19.1 D1.1 D4.1 J2.6 J3.A1/B12 J3.A12/B1 R4.1 R7.1 R8.2 R9.2 S1.3 S2.3 U1.12 U1.18 U1.31 U1.47 U1.63 U2.6 U2.7 U3.1 U4.1 U5.1 U6.1 Y1.2 | length 123.5
  Top Layer w0.2: 11.025,19.725 11.025,19.745 11.555,20.275 13.63,20.275 13.955,20.6 ; Y1.2@11.275,25.1 Y1.2
  Top Layer w0.25: C10.1 10.075,40.8 10.375,40.5 U2.7 U2.6
  Top Layer w0.3: C16.1 3,7.275 v1(3,5.8) ; S2.3 4.415,21.975 4.615,21.775 4.615,20.485 v1(4.65,20.45) v1@4.6,20.4 ; U6.1 4.703,12.391 4.703,12.022 5.312,11.413 ; v1@4.648,30.675 S1.3@5.85,30.675 ; U6.1@4.718,12.376 v1(5.825,12.376) ; v1(6.275,19.925) 7.225,19.925 C3.1 ; C3.1@6.975,19.1 7.475,19.6 C3.1 ; C11.1 8.625,35.975 v1(8.625,34.825) ; U4.1@8.7,12.608 8.7,11.9 8.213,11.413 5.312,11.413 ; C10.1 v1(10.075,43.5) ; v1(10.8,17.675) 9.6,17.675 D1.1@9.575,17.65 ; C18.1@10.839,12.786 C18.1 11.5,12.125 12.14,12.125 12.465,11.8 v1(12.6,11.8) ; v1(10.9,7.8) 10.9,6.677 10.849,6.626 U5.1 8.703,6.426 7.577,5.3 6.85,5.3 6.275,5.875 6.275,10.45 5.312,11.413 ; 11.025,19.725 11.025,19.475 10.35,18.8 10.35,18.425 D1.1@9.575,17.65 ; Y1.2@11.275,25.1 C1.1 9.4,24.85 9.4,23.525 7.475,21.6 C3.1 ; 13.955,20.6 14.505,21.15 14.825,21.15 C8.1 15.575,21.4 U1.12 ; v1(14.2,28.95) 15.325,28.95 C9.1 ; v1(17.25,15.3) 18.775,15.3 C19.1 19.35,15.725 19.35,15.995 19.68,16.325 19.82,16.325 20.05,16.555 20.05,19.9 v2(21.3,21.15) ; v1(19.3,32.075) 19.3,30.775 C5.1 19.275,30.675 19.775,30.175 19.85,30.175 20.05,29.975 U1.63 ; v1(23.5,14.9) 23.474,14.874 23.474,14.026 23.65,13.85 24.6,13.85 C2.1 ; v2(25.3,25.15) 26.55,26.4 28.312,26.4 U1.47 29.895,26.4 30.12,26.625 30.35,26.625 C4.1 ; U1.31 26.55,15.425 C7.1 ; J2.6 28.265,42.222 28.75,42.707 v1(29.825,42.707) ; C15.1 31.65,5.9 v1(31.65,4.675) ; R4.1 33.1,19.375 v1(34.35,19.375) ; R7.1 33.475,9.375 v1(33.475,10.6) ; v1(34.925,25.975) 34.925,26.95 R8.2 ; R8.2@34.969,26.975 35.074,27.081 R8.2@35.269,27.081 ; v1(35,36.3) R9.2 35.175,35.2 35.875,34.5 J3.A12/B1 ; J3.A1/B12@36.641,27.95 36.891,27.95 J3.A1/B12@36.989,28.048 ; J3.A1/B12@36.641,28.1 J3.A1/B12 J3.A1/B12@36.989,28.048 ; J3.A1/B12@37.35,28.048 J3.A1/B12@36.989,28.048 ; v1(37.6,8.4) 37.65,8.45 38.45,8.45 39.113,9.112 ; v1(37.8,25.7) 37.896,25.604 38.371,25.604 39.025,24.95 D4.1 37.55,24.8 35.725,26.625 35.475,26.625 35.269,26.831 R8.2@35.269,27.081 ; v1(37.9,22.7) C12.1 ; v1(38.1,20.8) 39.1,20.8 ; v1(40.3,14.4) 40.3,15.1 C13.1 ; C3.1 7.975,19.175 7.975,18.905 8.83,18.05 9.075,18.05 D1.1 D1.1@9.575,17.65 ; R8.2@35.269,27.081 35.269,27.119 35.475,27.325 35.475,27.481 36.041,28.048 J3.A1/B12@36.989,28.048
  Top Layer w1: 38.7,15.6 38.7,9.525 39.113,9.112 39.915,8.31 U3.1 ; C12.1 39.1,20.8 39.1,19.4 40.575,17.925 40.65,17.925 40.8,17.775 C14.1
  other v1: 4.675,30.675
  other v2: 25.3,21.15 21.3,25.15
IMU_INT1: U1.61 U2.4 | length 36.1
  Top Layer w0.2: v1(8.125,33.125) 8.15,33.1 8.15,30.8 9,29.95 12.225,29.95 16.525,34.25 19.175,34.25 21.05,32.375 U1.61 ; U2.4 v1(13.675,39.85)
  Bottom Layer w0.2: v1(8.125,33.125) 7.025,34.225 7.025,38.15 8.45,39.575 12.875,39.575 13.035,39.735 13.56,39.735 v1(13.675,39.85)
IMU_INT2: U1.62 U2.9 | length 29.9
  Top Layer w0.2: U2.9 8.1,39.35 7.25,38.5 7.25,31.75 7.725,31.275 7.725,30.55 8.95,29.325 12.325,29.325 16.675,33.675 19.025,33.675 20.55,32.15 U1.62
IMU_SCL: R2.2 TP3.1 U1.58 U2.13 | length 25.5
  Top Layer w0.2: U2.13 10.875,37.55 11.6,36.825 TP3.1 11.6,34.35 R2.2 v1(11.575,33.125) ; v1(15.5,36.75) 18.8,36.75 22.55,33 U1.58
  Bottom Layer w0.2: v1(11.575,33.125) 11.662,33.212 15.383,33.212 15.5,33.33 v1(15.5,36.75)
IMU_SDA: R1.2 TP2.1 U1.59 U2.14 | length 18.4
  Top Layer w0.2: U2.14 11.375,37.925 11.4,37.9 11.575,37.9 12.842,36.633 12.842,36.35 13.242,35.95 R1.2 ; TP2.1@13.45,37.225 13.45,36.075 R1.2 ; U1.59 22.05,32.725 18.825,35.95 R1.2
IMU_SDO: U1.57 U2.1 | length 17.5
  Top Layer w0.2: U2.1 18.05,38.35 23.05,33.35 U1.57
MCU_ANTI_TAMP: R3.1 U1.2 | length 21.2
  Top Layer w0.25: v1(5.675,17.525) 7.275,17.525 R3.1 ; v1(15.95,25.9) 16.046,25.9 16.546,26.4 U1.2
  Bottom Layer w0.25: v1(5.675,17.525) 6.25,16.95 12.748,16.95 13.8,18.002 13.8,22.125 15.95,24.275 v1(15.95,25.9)
MCU_BOOT0: R5.2 U1.60 | length 25.1
  Top Layer w0.2: R5.2 6.275,25.525 v1(6.275,27.125) ; v1(9.475,30.9) 12.45,30.9 16.3,34.75 19.325,34.75 21.55,32.525 U1.60
  Bottom Layer w0.2: v1(6.275,27.125) 9.36,30.21 9.36,30.785 v1(9.475,30.9)
MCU_JTCLK: J2.4 U1.49 | length 13
  Top Layer w0.2: J2.4 25.725,40.122 26.725,39.122 26.725,31.95 27.05,31.625 U1.49
MCU_JTD0: J2.3 U1.55 | length 8.7
  Top Layer w0.2: U1.55 24.05,29.875 25.725,31.55 J2.3
MCU_JTDI: U1.50
MCU_JTMS: J2.5 U1.46 | length 15.4
  Top Layer w0.2: J2.5 28.265,34.16 32.275,30.15 32.275,26.751 31.649,26.125 30.4,26.125 30.175,25.9 U1.46
MCU_JTRST: J2.2 U1.56 | length 13.4
  Top Layer w0.2: J2.2 23.185,40.122 24.5,38.807 24.5,31.1 23.55,30.15 U1.56
MCU_LED_A: D2.2 U1.34 | length 2.6
  Top Layer w0.3: U1.34 30.9,19.9 31.325,19.475 D2.2
MCU_NRST: C3.2 S1.1 U1.7 | length 26.7
  Top Layer w0.2: S1.1@1.398,30.627 1.446,30.675 v1(2.6,30.675) ; v1(9.075,21.125) C3.2 10.138,19.675 11.288,20.825 12.6,20.825 15.675,23.9 U1.7@18.151,23.9
  Bottom Layer w0.2: v1(2.6,30.675) 2.6,27.848 3.148,27.3 4.1,27.3 5.7,25.7 5.7,23.8 8.385,21.115 9.065,21.115 v1(9.075,21.125)
MCU_OSC_IN: U1.5 Y1.3 | length 5.2
  Top Layer w0.2: Y1.3 13.925,25.8 14.85,25.8 15.725,24.925 U1.5@17.6,24.925
MCU_OSC_OUT: TP1.1 U1.6 | length 3
  Top Layer w0.2: TP1.1 U1.6
MCU_PA1: J1.1 U1.15 | length 21.2
  Top Layer w0.2: U1.15 16.55,19.9 16.433,19.783 16.433,19.033 14.098,16.698 14.098,5.252 15.75,3.6 17.11,3.6 17.645,4.135 J1.1
MCU_PA2: J1.3 U1.16 | length 20.5
  Top Layer w0.2: U1.16 17,19.4 16.95,19.35 16.95,18.775 14.675,16.5 14.675,8.45 16.6,6.525 19.015,6.525 20.185,5.355 J1.3
MCU_PA3: J1.5 U1.17 | length 21.6
  Top Layer w0.2: U1.17 17.925,17.45 15.273,14.798 15.273,8.573 16.886,6.96 20.274,6.96 21.12,6.114 21.12,4.82 21.79,4.15 J1.5
MCU_PA4: J1.2 U1.20 | length 12.4
  Top Layer w0.2: J1.2@17.11,10.47 17.645,9.935 J1.2 18.18,9.635 18.18,11.13 18.8,11.75 19.925,11.75 21.525,13.35 21.525,15.949 21.224,16.25 21.2,16.25 21.05,16.4 U1.20
MCU_PA5: J1.4 U1.21 | length 9.2
  Top Layer w0.2: J1.4 20.6,9.515 20.6,11.625 21.925,12.95 21.925,16.15 21.55,16.525 U1.21
MCU_PA6: J1.7 U1.22 | length 16.7
  Top Layer w0.2: U1.22 22.1,17.4 22.1,16.576 22.3,16.376 22.3,12.675 21.325,11.7 21.325,7.138 22.018,6.445 24.175,6.445 25.265,5.355 J1.7
MCU_PA7: J1.9 U1.23 | length 18.8
  Top Layer w0.2: U1.23 22.6,17.4 22.6,16.683 22.6,16.576 22.7,16.476 22.7,12.375 21.762,11.437 21.762,7.164 22.154,6.772 25.542,6.772 26.2,6.114 26.2,4.82 26.87,4.15 J1.9
MCU_PA8: J1.6 U1.41 | length 27.8
  Top Layer w0.2: J1.6 22.725,10.305 24.17,11.75 29.975,11.75 35.275,17.05 35.275,21.025 33.15,23.15 30.074,23.15 29.874,23.35 29.05,23.35 U1.41
MCU_PA9: J1.8 U1.42 | length 26.8
  Top Layer w0.2: J1.8 25.708,9.543 25.708,11.208 25.825,11.325 30.075,11.325 35.725,16.975 35.725,21.2 33.375,23.55 30.174,23.55 29.874,23.85 29.767,23.85 29.05,23.85 U1.42
MCU_PA10: J1.10 U1.43 | length 25
  Top Layer w0.2: J1.10 27.805,9.713 28.34,10.248 29.673,10.248 36.225,16.8 36.225,21.375 33.65,23.95 30.4,23.95 29.95,24.4 U1.43
NetD1_2: D1.2 R3.2 | length 2.3
  Top Layer w0.3: R3.2 7.5,15.95 9.075,15.95 D1.2
NetD2_1: D2.1 R4.2 | length 1.8
  Top Layer w0.25: D2.1 31.75,17.7 32.825,17.7 R4.2
NetD3_2: D3.2 R7.2 | length 1.9
  Top Layer w0.3: D3.2 31.175,8.7 31.638,9.163 R7.2
NetR5_1: R5.1 S2.2 | length 2.2
  Top Layer w0.2: S2.2 6.025,23.475 R5.1
NetU4_4: U4.4 U5.2 | length 4
  Top Layer w0.2: U5.2 7.203,7.653 7.6,8.05 8.35,8.05 8.75,8.45 8.75,9.558 U4.4
NetU5_4: U5.4 U6.2 | length 13.2
  Top Layer w0.2: U6.2 2.95,12.638 2.95,11.425 3.425,10.95 4.8,10.95 5.675,10.075 5.675,5.75 6.65,4.775 8.25,4.775 8.703,4.322 U5.4
USB_CC1: J3.A5 R8.1 | length 2.7
  Top Layer w0.3: R8.1 35.125,28.775 35.475,29.125 35.475,29.329 36.196,30.05 J3.A5
USB_CC2: J3.B5 R9.1 | length 2.2
  Top Layer w0.25: R9.1 35.35,33.05 J3.B5
USB_D_N: J3.A7 J3.B7 U1.44 | length 15.7
  Top Layer w0.25: U1.44@29.025,24.875 U1.44 29.025,24.925 29.675,24.925 29.885,24.925 29.934,24.975 30.4,24.975 30.52,24.855 ; 35.63,30.485 35.75,30.605 36.176,30.605 36.206,30.575 37.016,30.575 J3.B7 ; J3.A7 37.066,31.525 37.876,31.525 38.275,31.126 38.275,30.9 37.95,30.575 J3.B7@37.066,30.575
  Top Layer w0.49: 30.52,24.855 32.545,24.855 33.725,26.034 33.725,29.735 34.475,30.485 35.63,30.485
USB_D_P: J3.A6 J3.B6 U1.45 | length 14.7
  Top Layer w0.25: U1.45 29.025,25.375 29.675,25.375 29.885,25.375 29.895,25.365 30.4,25.365 30.52,25.485 ; 35.63,31.115 35.75,30.995 36.176,30.995 36.206,31.025 37.016,31.025 J3.A6 ; 36.175,31.107 35.882,31.4 35.882,31.7 36.206,32.025 37.016,32.025 J3.B6
  Top Layer w0.49: 30.52,25.485 32.285,25.485 33.095,26.295 33.095,29.996 34.214,31.115 35.63,31.115
VBUS: C12.2 D4.2 FB1.1 J3.A4/B9 J3.A9/B4 | length 18.4
  Top Layer w0.2: J3.A4/B9 37.241,29.1 37.987,29.1 38.387,29.5 38.675,29.5 ; J3.A9/B4 37.241,33.5 37.987,33.5 38.052,33.435 38.465,33.435 39.3,32.6 39.3,30.125 38.7,29.525 ; C12.2@40.774,22.626 C12.2 C12.2@40.775,22.775
  Top Layer w0.5: 38.7,29.525 39.4,29.525 40.5,28.425 40.5,25.075 D4.2 C12.2@40.775,22.775 ; FB1.1 C12.2@40.774,22.626
VCAP1: C2.2 U1.30 | length 2.8
  Top Layer w0.3: C2.2 24.9,15.225 25.4,15.725 25.4,15.905 26.05,16.555 U1.30
pads on no net: J3.A8 J3.B8 J3.MH1 J3.MH2 J3.Shell S1.2 S1.4 S2. S2.4 S2.5 S2.6 S2.7 U1.3 U1.4 U1.8 U1.9 U1.10 U1.11 U1.14 U1.24 U1.25 U1.26 U1.27 U1.28 U1.29 U1.33 U1.36 U1.37 U1.38 U1.39 U1.40 U1.51 U1.52 U1.53 U1.54 U2.2 U2.3 U2.10 U2.11 U6.4

## Polygon pours and split planes (outlines as drawn)
GND on Top Layer "GND_L01_P010" (solid, pour order 10): 20,26.5 26.75,26.5 26.75,19.5 20,19.5
+3V3 on Top Layer "+3V3_L01_P009" (solid, pour order 9): 32.6,8.226 32.6,5.176 33.837,5.176 33.837,6.351 34.586,7.1 36.125,7.1 36.125,12.25 34.3,12.25 34.3,8.339 34.162,8.201 34.137,8.226
GND on Top Layer "GND_L01_P000" (solid, remove dead copper, pour order 0): 24,14.225 25.8,14.225 26.1,14.525 26.1,15.925 27.3,15.925 27.3,12.725 26.1,12.725 25.8,13.025 24,13.025
GND on Top Layer "GND_L01_P005" (solid, pour order 5): 38.192,16.1 39.925,16.1 40.175,16.35 40.175,18.4 41.4,18.4 41.425,18.425 41.425,14.9 40.2,14.9 40.175,14.875 39.9,15.15 38.192,15.15
GND on Top Layer "GND_L01_P004" (solid, pour order 4): 38.5,25.5 38.5,22 39.7,22 39.7,23.6 39.6,23.7 39.6,25.5
+5V on Top Layer "+5V_L01_P002" (solid, pour order 2): 41.8,14 41.5,14 40.9,13.4 40.9,12.4 42.9,12.4 42.9,14.4 43,14.5 43,21.1 41.8,21.1
+3V3 on Top Layer "+3V3_L01_P001" (solid, pour order 1): 8.95,27.3 10.45,27.3 10.85,27.7 15.65,27.7 15.65,26.75 13.8,26.75 13.55,26.5 10.85,26.5 10.45,26.1 8.95,26.1
GND on Bottom Layer "GND_L02_P008" (solid, pour order 8): 42.46,45 cw(c42.46,42.46) 45,42.46 45,2.54 cw(c42.46,2.54) 42.46,0 2.54,0 cw(c2.54,2.54) 0,2.54 0,42.46 cw(c2.54,42.46) 2.54,45

## Silkscreen, mask and mechanical layers (free items; w line width, h text height)
Top Overlay:
  region: 3511 vertices and 2 holes, not listed, extent 34.424,38.901 37.622,43.926
  text "RS" at 22.545,43.645 h0.8
  text "GND" at 27.465,43.64 h0.8
  text "CLK" at 24.795,43.62 h0.8
  text "JTAG" at 32.146,36.754 h1.52 r90
  text "USB" at 40.354,36.654 h1.52
  text "DO" at 26.105,33.32 h0.8 r90
  text "3V3" at 23.68,32.02 h1 r90
  text "JTMS" at 28.78,31.57 h0.84 r90
Mechanical 1:
  the board outline again, w0.5